# Altium PCB bh_rs485_0_alph.PcbDoc
Units mm, origin at the board's own origin, x right, y up, seen from the top; angles counter-clockwise.
Board outline 32 x 35 mm, 2 copper layers (Top Layer, Bottom Layer); 11 components, 12 nets, 49 pads, 6 vias.
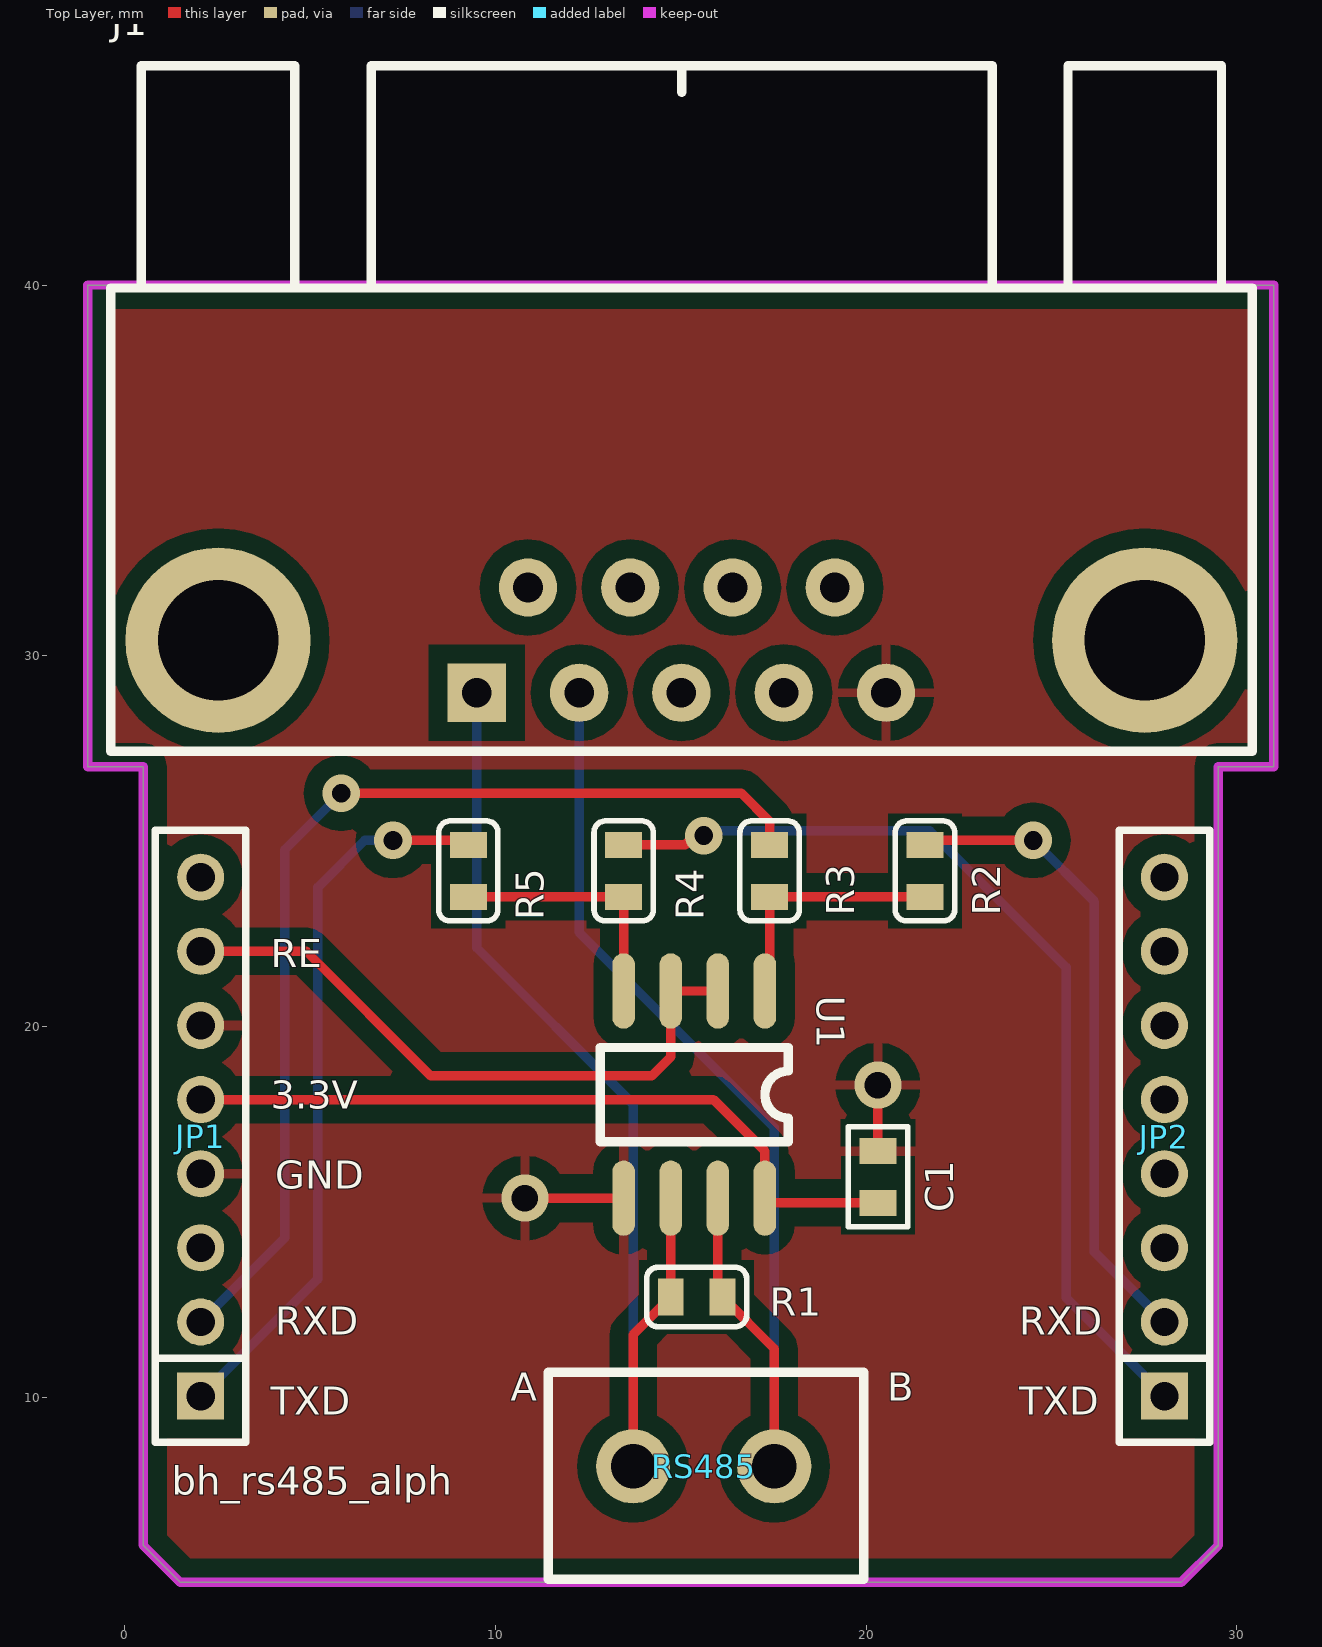
[diagram p0: Top Layer view]
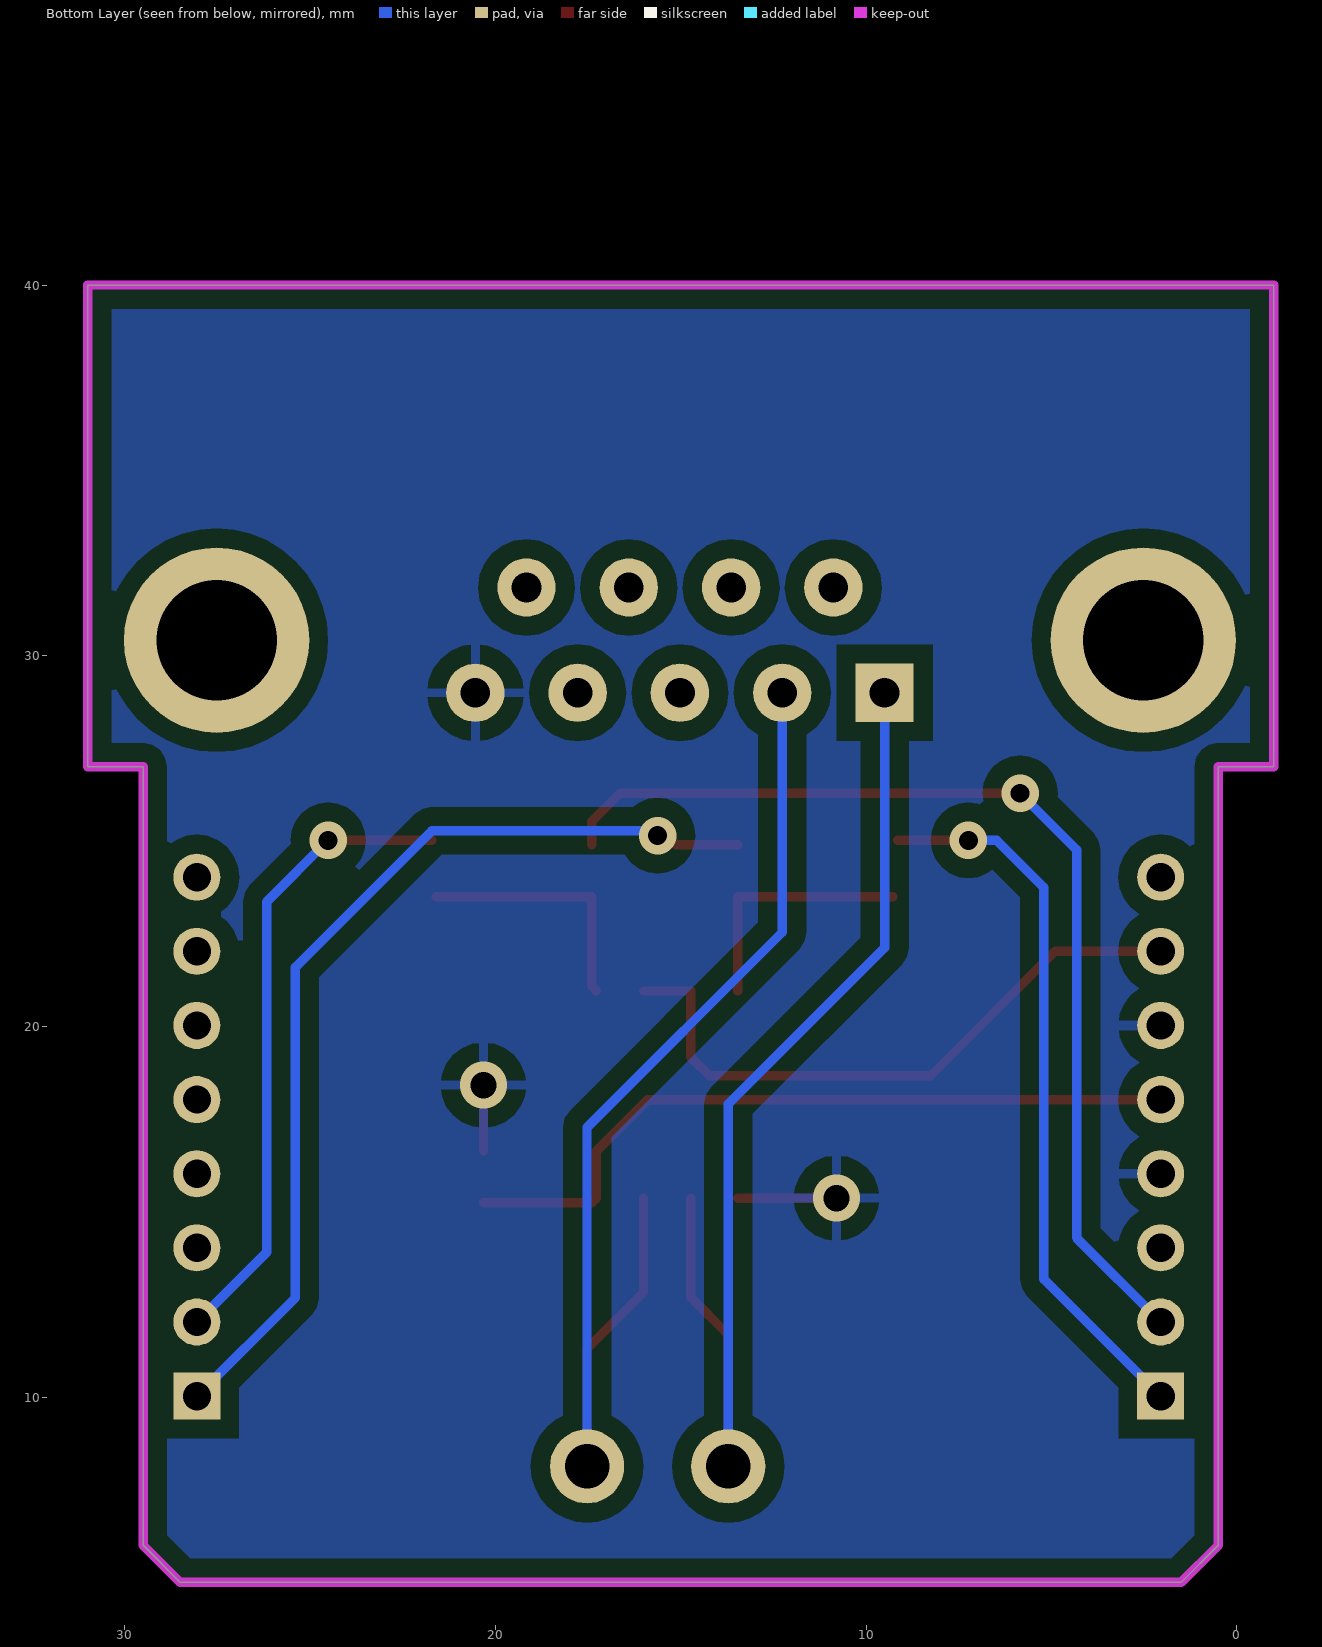
[diagram p1: Bottom Layer view, seen from below]
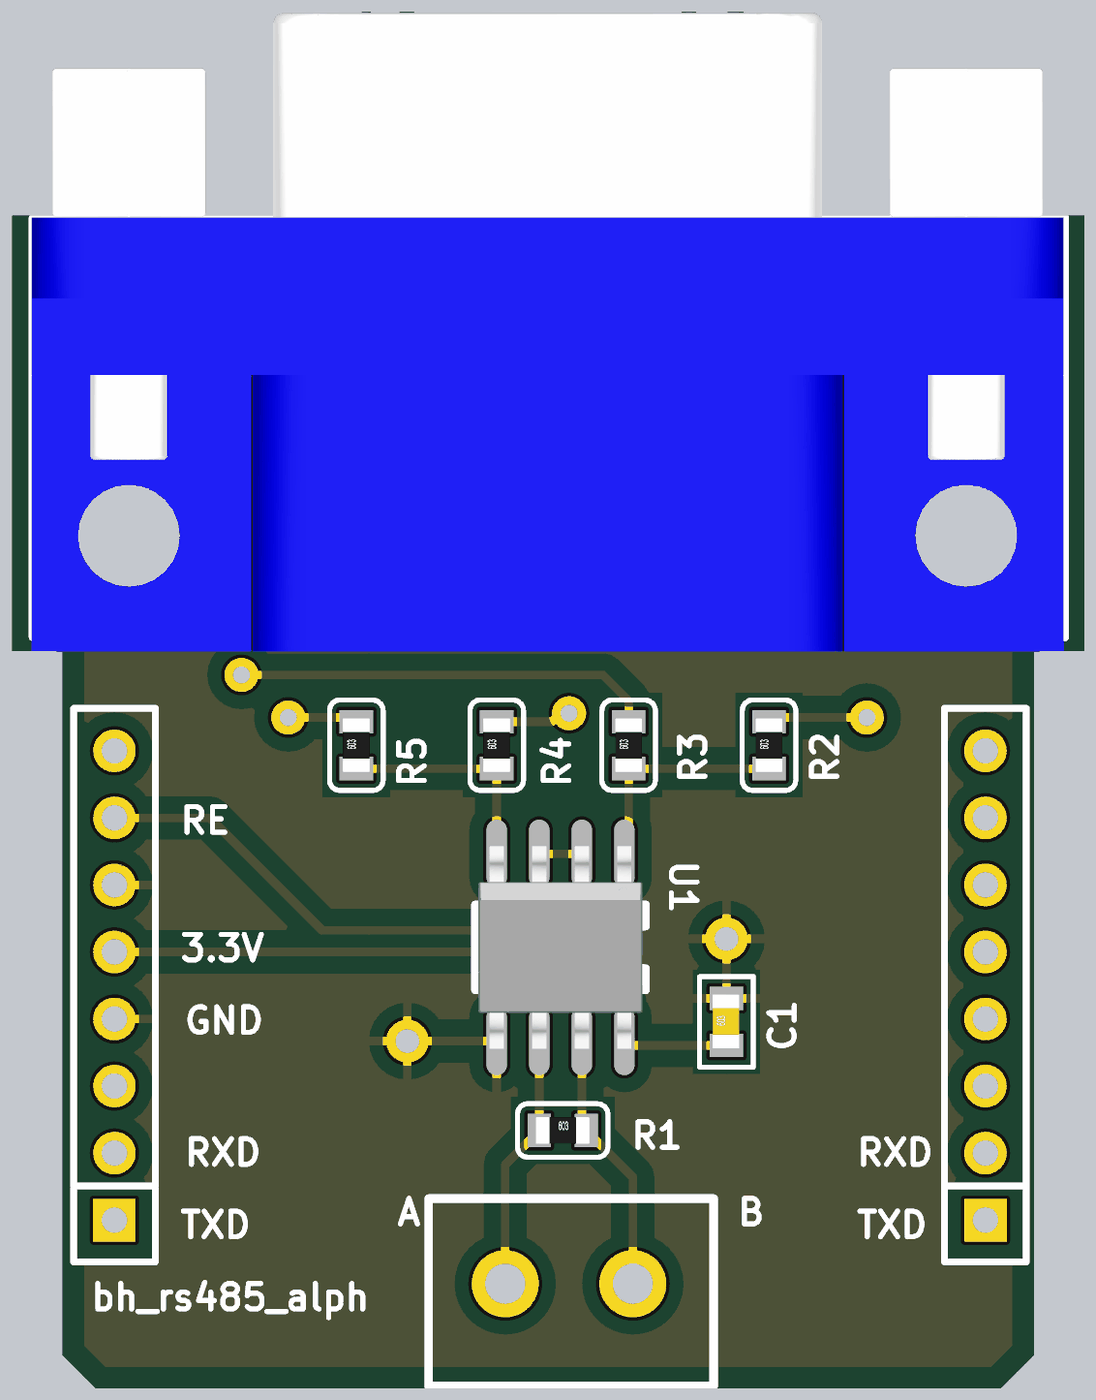
[diagram p2: 3D render of the assembled board from above, using the file's embedded part models]

## Layer stack, top to bottom
Top Layer: signal copper 0.0356
Dielectric: dielectric 0.32, FR-4, Dk 4.8
Bottom Layer: signal copper 0.0356

## Board outline
-1,27 -1,40 31,40 31,27 29.5,27 29.5,6 28.5,5 1.5,5 0.5,6 0.5,27

## Design rules (kind name [scope] priority, off if disabled: settings)
Clearance Clearance_1 [(InPolygon)] p1: gap=0.508
Clearance [All] p2: gap=0.254
HoleSize [All] p1: absolutevalues=TRUE maxlimit=25.4 minlimit=0.025 maxpercent=80.000 minpercent=20.000
MinimumSolderMaskSliver [All] p1: minsoldermaskwidth=0.178
PolygonConnect [All] p1: connectstyle=Relief reliefconductorwidth=0.254 reliefentries=4 polygonreliefangle="90 Angle"
RoutingVias [All] p1: holewidth=0.711 width=1.27 viastyle="Through Hole" minholewidth=0.457 minwidth=0.914 maxholewidth=0.711 maxwidth=1.27
SilkscreenOverComponentPads [All] p1: minsilkscreentomaskgap=0.178
SolderMaskExpansion [All] p1: expansion=0.102
Width [All] p1: maxlimit=0.254 minlimit=0.254 preferedwidth=0.254
25 further rules are at their usual default settings.

## Components (designator, comment, footprint, x,y, rotation, side; value= is the part's Value field where it differs from the comment)
C1 "CAP-SMD" C0603 20.32,15.24 r90 top
J1 "DB9M" DB9/M 9.5,29 r0 top locked
JP1 "Socket1-A" SIP1x8x2.0 2,10 r90 top locked
JP2 "Socket1B" SIP1x8x2.0 28,10 r90 top locked
R1 "120" R0603 14.732,12.7 r0 top
R2 "0" R0603 21.59,23.495 r90 top
R3 "0" R0603 17.399,23.495 r90 top
R4 "0" R0603 13.462,23.495 r90 top
R5 "0" R0603 9.271,23.495 r90 top
RS485 "RS485" CON2*0.381 16.256,10.668 r270 top (schematic designator J2)
U1 "MAX3485ESA" SO-8 17.272,20.955 r270 top

## Footprints (in the part's own frame and the unit in brackets; to place one, negate y for a bottom-side part, rotate by r counter-clockwise, add the part's x,y. Pads: shape width x height; smd on the part's side, far side on the other; paste and mask are expansions set on the pad)
C0603 [mm]
  rect 0.7x1 smd: 1(0,0) 2(1.4,0)
  silkscreen extent -0.65,-0.8 2.05,0.8, body extent -0.09,-0.38 1.51,0.42, height 0.3
CON2*0.381 [mm] "Green"
  round 2 hole 1.2: 1(2.54,1.27) 2(2.54,-2.54)
  silkscreen extent 0,-4.83 5.59,3.68
DB9/M [mm]
  rect 1.575x1.575 hole 0.8: 1(0,0)
  round 1.575 hole 0.8: 2(2.76,0) 3(5.52,0) 4(8.28,0) 5(11.04,0) 6(1.38,2.84) 7(4.14,2.84) 8(6.9,2.84) 9(9.66,2.84)
  round 5 hole 3.25: 10(-6.98,1.42) 11(18.02,1.42)
  silkscreen extent -9.88,-1.58 20.92,16.92, body extent -9.93,-2.01 20.88,17.06, height 12.81
R0603 [mm]
  rect 0.7x1 smd: 1(0,0) 2(1.4,0)
  silkscreen extent -0.65,-0.8 2.05,0.8, body extent -0.1,-0.4 1.5,0.4, height 0.3
SIP1x8x2.0 [mil]
  rect 50x50 hole 30: 1(1,-2)
  round 50 hole 30: 2(79.74,-2) 3(158.48,-2) 4(237.22,-2) 5(315.96,-2) 6(394.7,-2) 7(473.44,-2) 8(552.18,-2)
  silkscreen extent -48,-50 602,46
SO-8 [mil]
  oval 80x24 smd: 1(0,0) 2(0,-50) 3(0,-100) 4(0,-150) 5(220,-150) 6(220,-100) 7(220,-50) 8(220,0)
  silkscreen extent 60,-175 160,25, body extent -9,-171 229,21, height 67

## Part data
C1: "SMD-CAP"
J1: "jointbar"
JP1 JP2: library part SIP1X8, "8 Pin Header"
R1 R2 R3 R4 R5: library part RES, "Resistor"
RS485: library part SIP1X2, "Connector"
U1: "X9511WP-10K"

## Via types
v1: diameter 1.016, hole 0.508, Top Layer to Bottom Layer, 4 vias
v2: diameter 1.27, hole 0.711, Top Layer to Bottom Layer, 2 vias

## Nets (pads, with @x,y where several pads share a name; then routed paths per layer and width w, separated by ;. In a path a pad name is that pad's centre, name@x,y a point inside that pad or via, vN(x,y) a via of type N, cw(c..) or ccw(c..) an arc to the next point about the centre after c; other vN are vias at no path point)
D/R: JP1.7 U1.2 U1.3 | length 17.3
  Top Layer w0.254: JP1.7 4.899,22.025 8.255,18.669 14.224,18.669 14.732,19.177 U1.3 U1.2
DATA+: J1.1 R1.1 RS485.2 U1.6 | length 30.3
  Top Layer w0.254: RS485.2 13.716,11.684 R1.1 U1.6
  Bottom Layer w0.254: J1.1 9.5,22.123 13.716,17.907 RS485.2
DATA-: J1.2 R1.2 RS485.1 U1.7 | length 30.9
  Top Layer w0.254: U1.7 16.002,12.83 R1.2 17.526,11.306 RS485.1
  Bottom Layer w0.254: J1.2 12.26,22.538 17.526,17.272 RS485.1
DI: R4.1 R5.1 U1.4 | length 6.7
  Top Layer w0.254: R5.1 R4.1 U1.4
EX_RXD2: JP1.2 R3.2 | length 28.3
  Top Layer w0.254: v1(5.842,26.289) 16.637,26.289 17.399,25.527 R3.2
  Bottom Layer w0.254: JP1.2 4.318,14.293 4.318,24.765 v1(5.842,26.289)
EX_TXD2: JP1.1 R5.2 | length 19.5
  Top Layer w0.254: v1(7.239,25.019) R5.2@9.147,25.019
  Bottom Layer w0.254: JP1.1 5.207,13.182 5.207,23.749 6.477,25.019 v1(7.239,25.019)
GND: C1.2 J1.5 JP1.4 JP1.6 U1.5 | length 4.4
  Top Layer w0.254: v2(10.795,15.367) U1.5 ; C1.2 v2(20.32,18.415)
RO: R2.1 R3.1 U1.1 | length 6.8
  Top Layer w0.254: U1.1 17.399,21.082 R3.1 R2.1
RXD0: JP2.2 R2.2 | length 17.3
  Top Layer w0.254: R2.2@21.714,25.019 v1(24.511,25.019)
  Bottom Layer w0.254: v1(24.511,25.019) 26.162,23.368 26.162,13.914 JP2.2
TXD0: JP2.1 R4.2 | length 26.6
  Top Layer w0.254: R4.2 15.116,24.895 15.494,25.273 v1(15.621,25.146)
  Bottom Layer w0.254: v1(15.621,25.146) 15.494,25.273 21.717,25.273 25.4,21.59 25.4,12.676 JP2.1
VCC_3.3V: C1.1 JP1.5 U1.8 | length 20.2
  Top Layer w0.254: JP1.5 15.884,18.025 17.272,16.637 U1.8 17.399,15.24 C1.1
VCC_5V: JP1.3
pads on no net: J1.3 J1.4 J1.6 J1.7 J1.8 J1.9 J1.10 J1.11 JP1.8 JP2.3 JP2.4 JP2.5 JP2.6 JP2.7 JP2.8

## Polygon pours and split planes (outlines as drawn)
GND on Bottom Layer "Top Layer-No Net" (solid, remove dead copper, pour order 1000): 0.5,27 -1,27 -1,40 31,40 31,27 29.5,27 29.5,6 28.5,5 1.5,5 0.5,6
GND on Top Layer "Top Layer-No Net" (solid, remove dead copper, pour order 1001): -1,40 31,40 31,27 29.5,27 29.5,6 28.5,5 1.5,5 0.5,6 0.5,27 -1,27

## Keep-outs
Keep-Out Layer:
  the board outline again, w0.254

## Silkscreen, mask and mechanical layers (free items; w line width, h text height)
Top Overlay:
  text "RE" at 3.937,21.59 h0.76
  text "3.3V" at 3.937,17.78 h0.76
  text "GND" at 4.064,15.621 h0.76
  text "RXD" at 4.064,11.684 h0.76
  text "RXD" at 24.13,11.684 h0.76
  text "A" at 10.414,9.906 h0.76
  text "B" at 20.574,9.906 h0.76
  text "TXD" at 3.937,9.525 h0.76
  text "TXD" at 24.13,9.525 h0.76
  text "bh_rs485_alph" at 1.27,7.366 h0.76